# EAGLE board microSRCPShieldV3 (EAGLE 6.5.0)
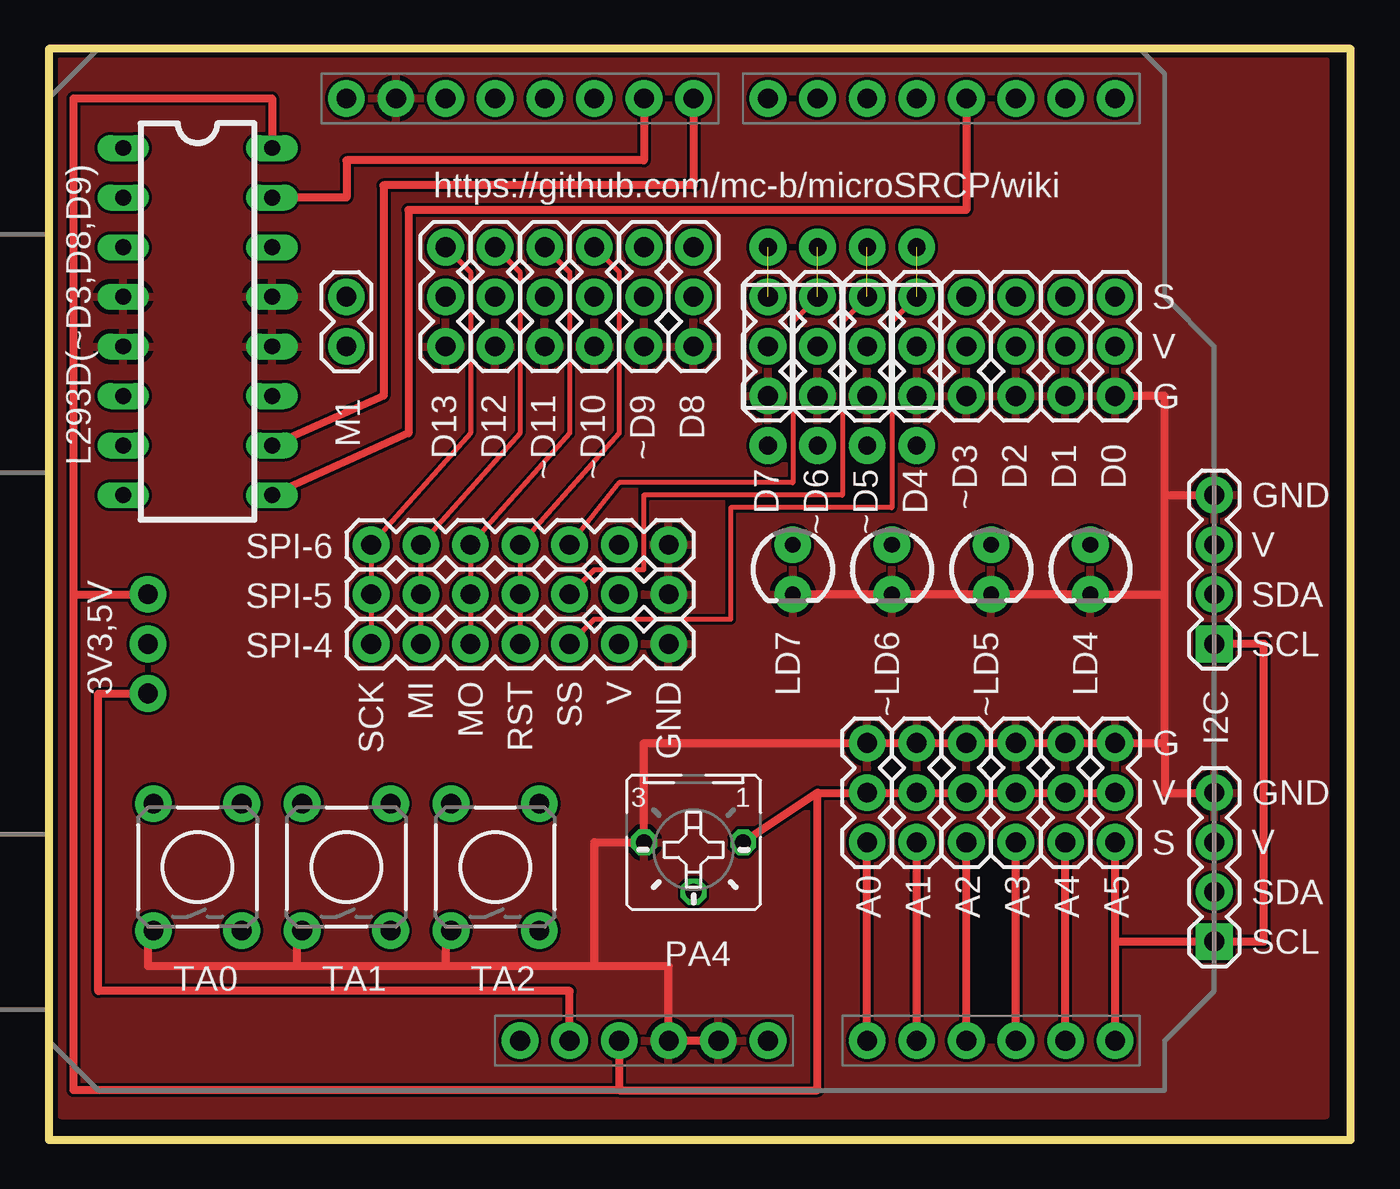
[diagram p0: board, top side]
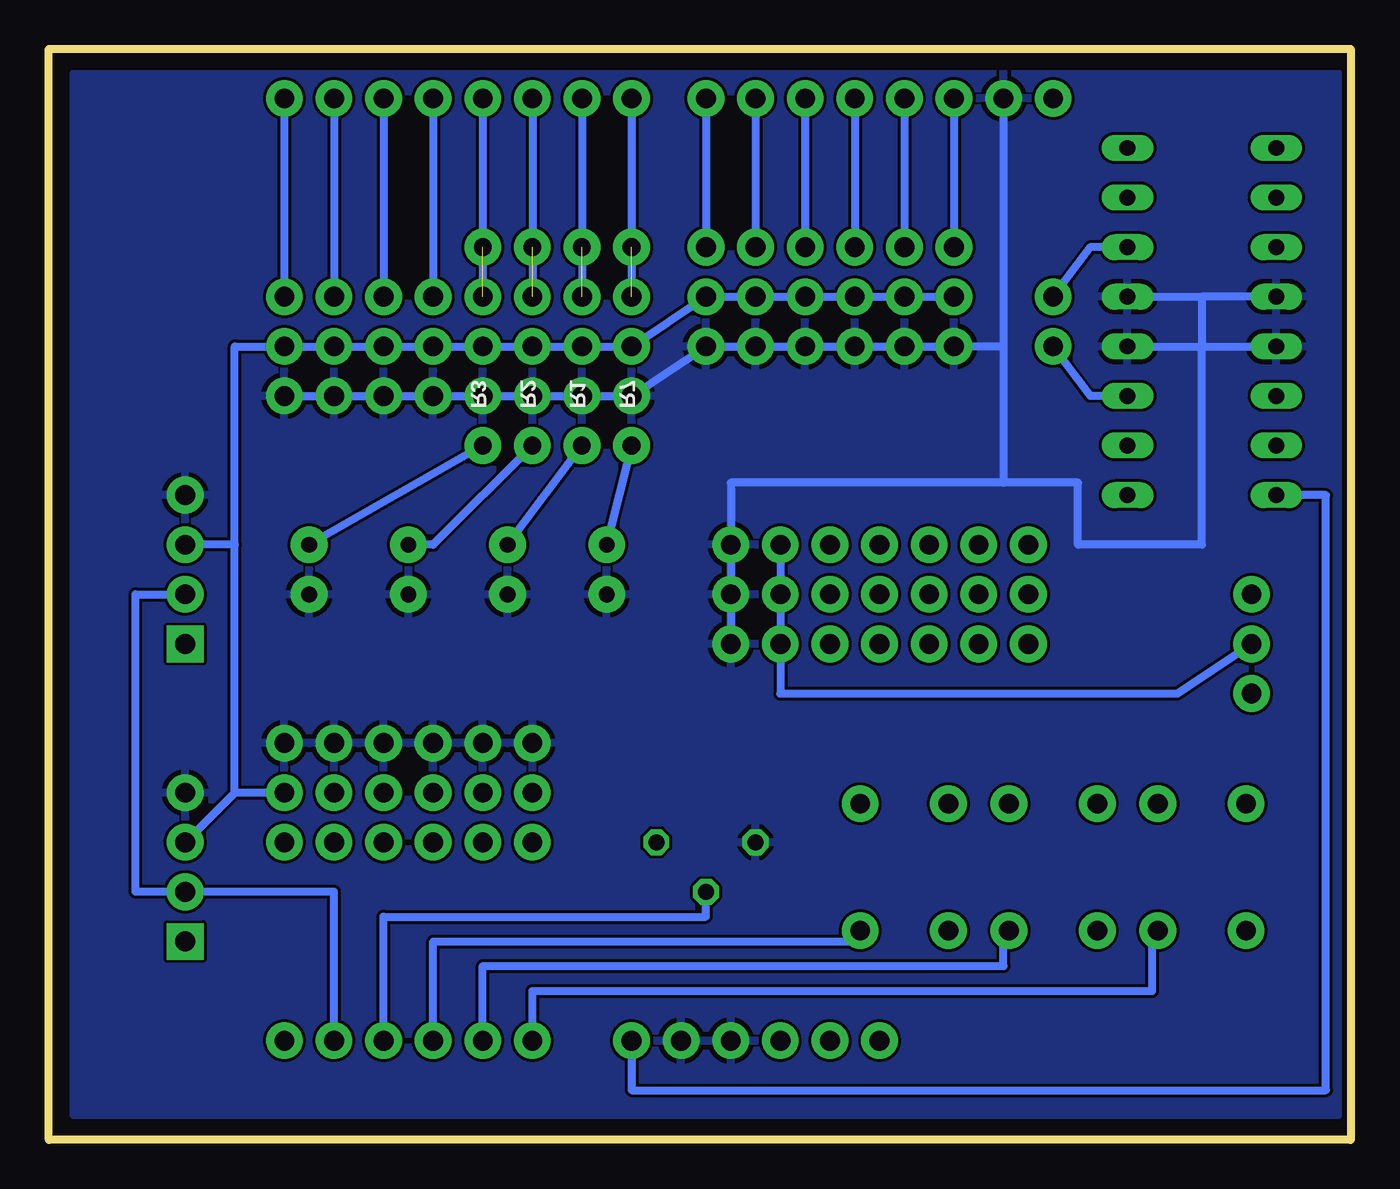
[diagram p1: board, bottom side, seen from below]

Size 66.67 x 55.88 mm. Coordinates in mm from the lower left corner, seen from the top.
Outline: 0,0 66.67,0 66.67,55.88 0,55.88 0,0
Copper layers (1*16): Top 0.035mm / dielectric 1.5mm / Bottom 0.035mm
Design rules "Elecrow_2-layer_eagle_rule": minimum track width 6mil, minimum drill 12mil, track to track 6mil, track to pad 6mil, pad to pad 6mil, via to via 6mil, smd to smd 0mil, copper to edge 10mil, drill to drill 10mil, minimum pad ring 10mil, minimum via ring 6mil, stop-mask expansion 2mil, vias tented up to drill 100mil, thermal gap 10mil

## Footprints (pad centres in the part's own frame; a part is rotated, then mirrored left to right if it is on the bottom)
1X03_NO_SILK = drill 1.016 pad 1.88: 1 0,0; 2 2.54,0; 3 5.08,0
1X03 = drill 1.016 pad 1.88: 1 0,0; 2 2.54,0; 3 5.08,0
DUEMILANOVE_SHIELD_NOHOLES_NOLABELS = drill 1.016 pad 1.88: 3.3V 50.8,26.67; 5V 50.8,29.21; A0 50.8,41.91; A1 50.8,44.45; A2 50.8,46.99; A3 50.8,49.53; A4 50.8,52.07; A5 50.8,54.61; AREF 2.54,15.24; D2 2.54,49.53; D3 2.54,46.99; D4 2.54,44.45; D5 2.54,41.91; D6 2.54,39.37; D7 2.54,36.83; D8 2.54,33.02; D9 2.54,30.48; D10 2.54,27.94; D11 2.54,25.4; D12 2.54,22.86; D13 2.54,20.32; GND@0 50.8,31.75; GND@1 50.8,34.29; GND@2 2.54,17.78; RES 50.8,24.13; RX 2.54,54.61; TX 2.54,52.07; VIN 50.8,36.83
1X04 = drill 1.016 pad 1.88 square: 1 0,0 | drill 1.016 pad 1.88: 2 2.54,0; 3 5.08,0; 4 7.62,0
DIL16 = drill 0.813 long: 1 -8.89,-3.81; 2 -6.35,-3.81; 3 -3.81,-3.81; 4 -1.27,-3.81; 5 1.27,-3.81; 6 3.81,-3.81; 7 6.35,-3.81; 8 8.89,-3.81; 9 8.89,3.81; 10 6.35,3.81; 11 3.81,3.81; 12 1.27,3.81; 13 -1.27,3.81; 14 -3.81,3.81; 15 -6.35,3.81; 16 -8.89,3.81
LED3MM = drill 0.813 pad 1.88: A -1.27,0; K 1.27,0
1X02 = drill 1.016 pad 1.88: 1 0,0; 2 2.54,0
B25P = drill 0.813 octagon: A -2.54,0; E 2.54,0; S 0,2.54
AXIAL-0.4 = drill 0.9 pad 1.88: P$1 -5.08,0; P$2 5.08,0
1X07 = drill 1.016 pad 1.88: 1 0,0; 2 2.54,0; 3 5.08,0; 4 7.62,0; 5 10.16,0; 6 12.7,0; 7 15.24,0
TACTILE-PTH = drill 1.016 pad 1.88: 1 -3.251,2.261; 2 3.251,2.261; 3 -3.251,-2.261; 4 3.251,-2.261

## Placement (x,y rotation side)
3V3,5V  [1X03_NO_SILK]  5.08,22.86 90 top
A0  [1X03]  41.91,15.24 90 top
A1  [1X03]  44.45,15.24 90 top
A2  [1X03]  46.99,15.24 90 top
A3  [1X03]  49.53,15.24 90 top
A4  [1X03]  52.07,15.24 90 top
A5  [1X03]  54.61,15.24 90 top
D0  [1X03]  54.61,43.18 270 top
D1  [1X03]  52.07,43.18 270 top
D2  [1X03]  49.53,43.18 270 top
D4  [1X03]  44.45,43.18 270 top
D7  [1X03]  36.83,43.18 270 top
D8  [1X03]  33.02,45.72 270 top
D12  [1X03]  22.86,45.72 270 top
D13  [1X03]  20.32,45.72 270 top
E$1  [DUEMILANOVE_SHIELD_NOHOLES_NOLABELS]  0,55.88 270 top
I2C  [1X04]  59.69,25.4 90 top
I2C-2  [1X04]  59.69,10.16 90 top
L293D(~D3,D8,D9)  [DIL16]  7.62,41.91 270 top
LD4  [LED3MM]  53.34,29.21 270 top
LD7  [LED3MM]  38.1,29.21 270 top
M1  [1X02]  15.24,40.64 90 top
PA4  [B25P]  33.02,15.24 180 top
R1  [AXIAL-0.4]  39.37,40.64 90 top
R2  [AXIAL-0.4]  41.91,40.64 90 top
R3  [AXIAL-0.4]  44.45,40.64 90 top
R7  [AXIAL-0.4]  36.83,40.64 90 top
SPI-4  [1X07]  16.51,25.4 0 top
SPI-5  [1X07]  16.51,27.94 0 top
SPI-6  [1X07]  16.51,30.48 0 top
TA0  [TACTILE-PTH]  7.62,13.97 90 top
TA1  [TACTILE-PTH]  15.24,13.97 90 top
TA2  [TACTILE-PTH]  22.86,13.97 90 top
~D3  [1X03]  46.99,43.18 270 top
~D5  [1X03]  41.91,43.18 270 top
~D6  [1X03]  39.37,43.18 270 top
~D9  [1X03]  30.48,45.72 270 top
~D10  [1X03]  27.94,45.72 270 top
~D11  [1X03]  25.4,45.72 270 top
~LD5  [LED3MM]  48.26,29.21 270 top
~LD6  [LED3MM]  43.18,29.21 270 top

## Library data of the parts
3V3,5V A0 A1-A5 D0 D1 D2 D4 D7 D8 D12 D13 I2C I2C-2 M1 SPI-4-SPI-6 ~D3 ~D5 ~D6 ~D9-~D11 = SparkFun-Connectors
E$1 = SparkFun-Boards
L293D(~D3,D8,D9) = SparkFun-AnalogIC
LD4 LD7 ~LD5 ~LD6 = SparkFun-LED
PA4 = pot
R1-R3 R7 = SparkFun-Capacitors
TA0 TA1 TA2 = SparkFun-Electromechanical

## Nets
GND: A0.3 A1.3 A2.3 A3.3 A4.3 A5.3 D0.3 D1.3 D2.3 D4.3 D7.3 D8.3 D12.3 D13.3 E$1.GND@0 E$1.GND@1 E$1.GND@2 I2C-2.4 I2C.4 L293D(~D3,D8,D9).4 L293D(~D3,D8,D9).5 L293D(~D3,D8,D9).12 L293D(~D3,D8,D9).13 LD4.K LD7.K PA4.E SPI-4.7 SPI-5.7 SPI-6.7 ~D3.3 ~D5.3 ~D6.3 ~D9.3 ~D10.3 ~D11.3 ~LD5.K ~LD6.K
S0: D0.1 E$1.RX
S1: D1.1 E$1.TX
S2: D2.1 E$1.D2
S3: E$1.D3 L293D(~D3,D8,D9).9 ~D3.1
S3V3: 3V3,5V.1 E$1.3.3V
S5: E$1.D5 R2.P$2 SPI-5.5 ~D5.1
S6: E$1.D6 R1.P$2 SPI-6.5 ~D6.1
S7: D7.1 E$1.D7 R7.P$2
S8: D8.1 E$1.D8 L293D(~D3,D8,D9).10
S10: E$1.D10 SPI-4.4 SPI-5.4 SPI-6.4 ~D10.1
S11: E$1.D11 SPI-4.3 SPI-5.3 SPI-6.3 ~D11.1
S12: D12.1 E$1.D12 SPI-4.2 SPI-5.2 SPI-6.2
S13: D13.1 E$1.D13 SPI-4.1 SPI-5.1 SPI-6.1
S$1: R2.P$1 ~LD5.A
S$2: 3V3,5V.2 SPI-4.6 SPI-5.6 SPI-6.6
S$3: E$1.D9 L293D(~D3,D8,D9).15 ~D9.1
S$4: D4.1 E$1.D4 R3.P$2 SPI-4.5
S$9: LD4.A R3.P$1
S$11: R1.P$1 ~LD6.A
S$12: LD7.A R7.P$1
SA0: A0.1 E$1.A0
SA1: A1.1 E$1.A1
SA2: A2.1 E$1.A2
SA3: A3.1 E$1.A3 PA4.S
SA4: A4.1 E$1.A4 I2C-2.2 I2C.2
SA5: A5.1 E$1.A5 I2C-2.1 I2C.1
SM1-L: L293D(~D3,D8,D9).14 M1.2
SM1R: L293D(~D3,D8,D9).11 M1.1
SVIN: E$1.VIN L293D(~D3,D8,D9).8
V5O: 3V3,5V.3 A0.2 A1.2 A2.2 A3.2 A4.2 A5.2 D0.2 D1.2 D2.2 D4.2 D7.2 D8.2 D12.2 D13.2 E$1.5V I2C-2.3 I2C.3 L293D(~D3,D8,D9).16 PA4.A ~D3.2 ~D5.2 ~D6.2 ~D9.2 ~D10.2 ~D11.2

## Tracks (layer width: path | path; a pad name or v marks a point on that pad's centre or on a via)
GND
  Top 0.406: E$1.GND@1 E$1.GND@0 31.75,8.89 27.94,8.89 | 27.94,8.89 27.94,15.24 PA4.E 30.48,20.32 A0.3 A1.3 A2.3 A3.3 A4.3 A5.3 57.15,20.32 | 27.94,8.89 20.32,8.89 | 20.32,10.16 20.32,8.89 | 20.32,8.89 12.7,8.89 | 12.7,10.16 12.7,8.89 | 12.7,8.89 5.08,8.89 5.08,10.16 | 57.15,20.32 57.15,27.94 | 57.15,27.94 57.15,33.02 | 57.15,33.02 57.15,38.1 D0.3 | 57.15,33.02 I2C.4 | LD7.K ~LD6.K ~LD5.K LD4.K 57.15,27.94 | 57.15,20.32 57.15,17.78 I2C-2.4
  Bottom 0.406: D0.3 D1.3 D2.3 ~D3.3 D4.3 ~D5.3 ~D6.3 D7.3 D8.3 ~D9.3 ~D10.3 ~D11.3 D12.3 D13.3 17.78,40.64 | E$1.GND@2 17.78,40.64 | 17.78,40.64 17.78,33.66 | 17.78,33.66 31.75,33.66 SPI-6.7 SPI-5.7 SPI-4.7 | L293D(~D3,D8,D9).13 7.62,43.18 | L293D(~D3,D8,D9).4 7.62,43.18 | L293D(~D3,D8,D9).12 7.62,40.64 | 7.62,43.18 7.62,40.64 | 7.62,40.64 L293D(~D3,D8,D9).5 | 7.62,40.64 7.62,30.48 13.97,30.48 13.97,33.66 17.78,33.66
  pour Bottom: 0.64,54.61 0.64,1.27 65.41,1.27 65.41,54.61
  pour Top: 0.64,55.24 0.64,1.27 65.41,1.27 65.41,1.91 65.41,55.24
S0
  Bottom 0.406: E$1.RX D0.1
S1
  Bottom 0.406: E$1.TX D1.1
S2
  Bottom 0.406: E$1.D2 D2.1
S3
  Top 0.406: E$1.D3 46.99,47.62 18.41,47.62 18.41,36.2 L293D(~D3,D8,D9).9
  Bottom 0.406: E$1.D3 ~D3.1
S3V3
  Top 0.406: E$1.3.3V 26.67,7.62 2.54,7.62 2.54,22.86 3V3,5V.1
S5  (1 unrouted)
  Top 0.254: ~D5.1 40.64,41.91 40.64,33.02 30.48,33.02 30.48,29.21 27.94,29.21 SPI-5.5
  Bottom 0.406: E$1.D5 ~D5.1
S6  (1 unrouted)
  Top 0.254: ~D6.1 38.1,41.91 38.1,33.66 29.21,33.66 SPI-6.5
  Bottom 0.406: E$1.D6 ~D6.1
S7  (1 unrouted)
  Bottom 0.406: E$1.D7 D7.1
S8
  Top 0.406: E$1.D8 33.02,48.9 17.14,48.9 17.14,38.1 L293D(~D3,D8,D9).10
  Bottom 0.406: E$1.D8 D8.1
S10
  Top 0.254: ~D10.1 29.21,44.45 29.21,36.2 SPI-6.4 SPI-5.4 SPI-4.4
  Bottom 0.406: E$1.D10 ~D10.1
S11
  Top 0.254: ~D11.1 26.67,44.45 26.67,36.2 SPI-6.3 SPI-5.3 SPI-4.3
  Bottom 0.406: E$1.D11 ~D11.1
S12
  Top 0.254: D12.1 24.13,44.45 24.13,36.2 SPI-6.2 SPI-5.2 SPI-4.2
  Bottom 0.406: E$1.D12 D12.1
S13
  Top 0.254: D13.1 21.59,44.45 21.59,36.2 SPI-6.1 SPI-5.1 SPI-4.1
  Bottom 0.406: E$1.D13 D13.1
S$1
  Bottom 0.406: R2.P$1 46.99,30.48 ~LD5.A
S$2
  Bottom 0.406: SPI-6.6 SPI-5.6 SPI-4.6 29.21,22.86 8.89,22.86 3V3,5V.2
S$3
  Top 0.406: E$1.D9 30.48,50.16 15.24,50.16 15.24,48.26 L293D(~D3,D8,D9).15
  Bottom 0.406: E$1.D9 ~D9.1
S$4  (1 unrouted)
  Top 0.254: D4.1 43.18,41.91 43.18,32.38 34.92,32.38 34.92,26.67 27.94,26.67 SPI-4.5
  Bottom 0.406: E$1.D4 D4.1
S$9
  Bottom 0.406: R3.P$1 LD4.A
S$11
  Bottom 0.406: R1.P$1 ~LD6.A
S$12
  Bottom 0.406: R7.P$1 LD7.A
SA0
  Top 0.406: E$1.A0 A0.1
  Bottom 0.406: E$1.A0 41.91,7.62 10.16,7.62 10.16,10.16
SA1
  Top 0.406: E$1.A1 A1.1
  Bottom 0.406: E$1.A1 44.45,8.89 17.78,8.89 17.78,10.16
SA2
  Top 0.406: E$1.A2 A2.1
  Bottom 0.406: E$1.A2 46.99,10.16 25.4,10.16
SA3
  Top 0.406: E$1.A3 A3.1
  Bottom 0.406: E$1.A3 49.53,11.43 33.02,11.43 PA4.S
SA4
  Top 0.406: E$1.A4 A4.1
  Bottom 0.406: E$1.A4 52.07,12.7 I2C-2.2 62.23,12.7 62.23,27.94 I2C.2
SA5
  Top 0.406: E$1.A5 54.61,10.16 | 54.61,10.16 A5.1 | 54.61,10.16 I2C-2.1 62.23,10.16 62.23,25.4 I2C.1
SM1-L
  Bottom 0.406: L293D(~D3,D8,D9).14 13.34,45.72 M1.2
SM1R
  Bottom 0.406: L293D(~D3,D8,D9).11 13.34,38.1 M1.1
SVIN
  Bottom 0.406: E$1.VIN 36.83,2.54 1.27,2.54 1.27,33.02 L293D(~D3,D8,D9).8
V5O
  Top 0.406: A5.2 A4.2 A3.2 A2.2 A1.2 A0.2 39.37,17.78 | 39.37,17.78 PA4.A | E$1.5V 29.21,2.54 | 29.21,2.54 39.37,2.54 39.37,17.78 | 29.21,2.54 1.27,2.54 1.27,27.94 | 1.27,27.94 3V3,5V.3 | 1.27,27.94 1.27,53.34 11.43,53.34 L293D(~D3,D8,D9).16
  Bottom 0.406: A5.2 57.15,17.78 | 57.15,17.78 57.15,30.48 | 57.15,30.48 57.15,40.64 D0.2 D1.2 D2.2 ~D3.2 D4.2 ~D5.2 ~D6.2 D7.2 D8.2 ~D9.2 ~D10.2 ~D11.2 D12.2 D13.2 | 57.15,17.78 I2C-2.3 | 57.15,30.48 I2C.3

## Text on the board
tNames: https://github.com/mc-b/microSRCP/wiki | S / V / G | GND / V / SDA / SCL | SCK / MI / MO / RST / SS / V / GND | G / V / S | GND / V / SDA / SCL